# Altium PCB ESP_8266.PcbDoc
Units mil, origin at the board's own origin, x right, y up, seen from the top; angles counter-clockwise.
Board outline 3942.6 x 4020.22 mil, 2 copper layers (Top, Bottom), stack 12.7 mil thick; 90 components, 68 nets, 313 pads, 72 vias.
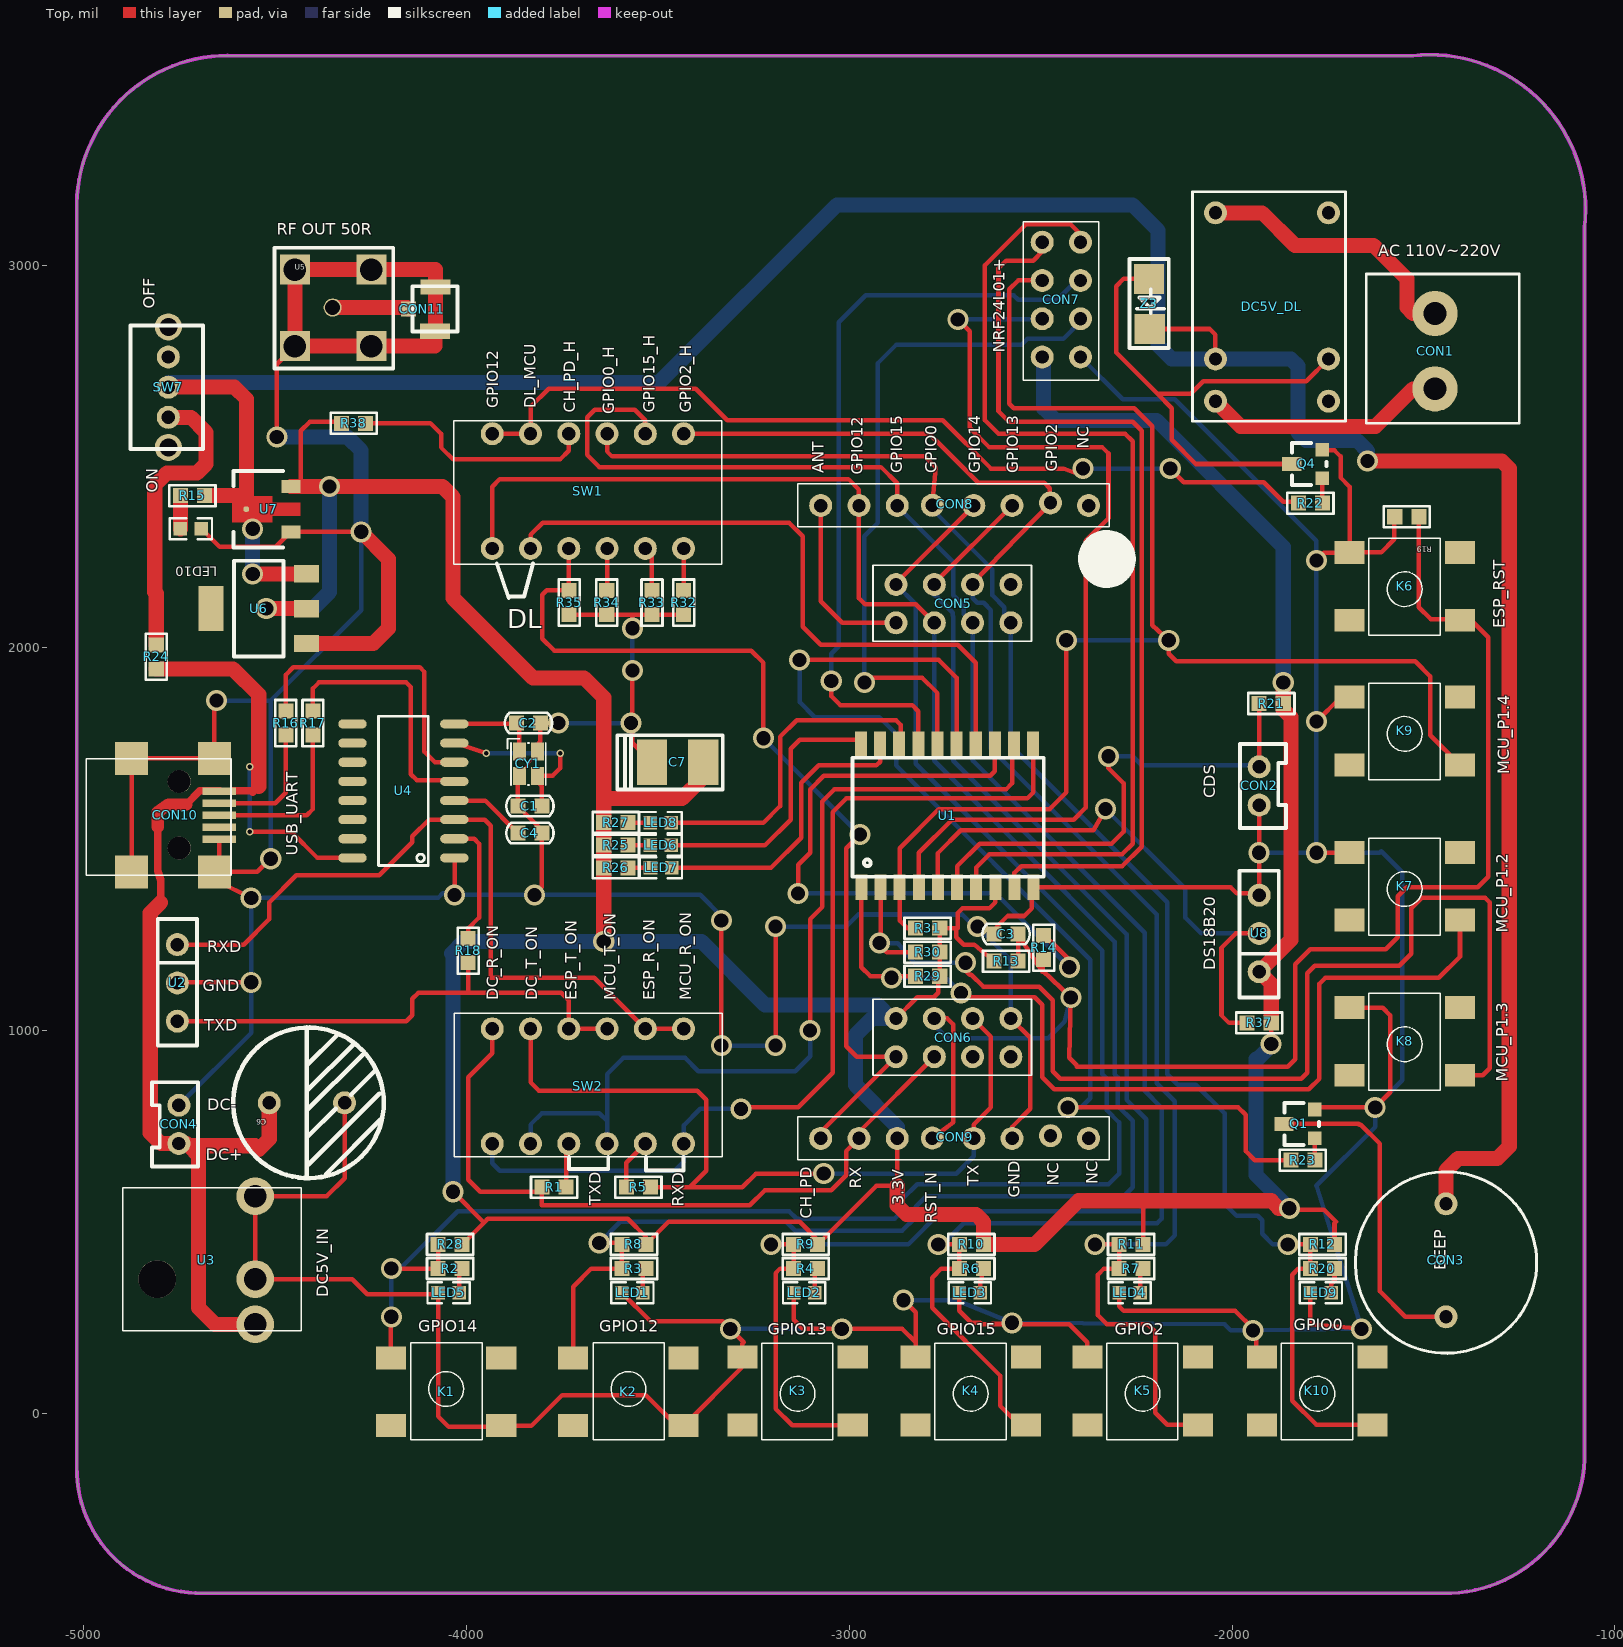
[diagram p0: Top view]
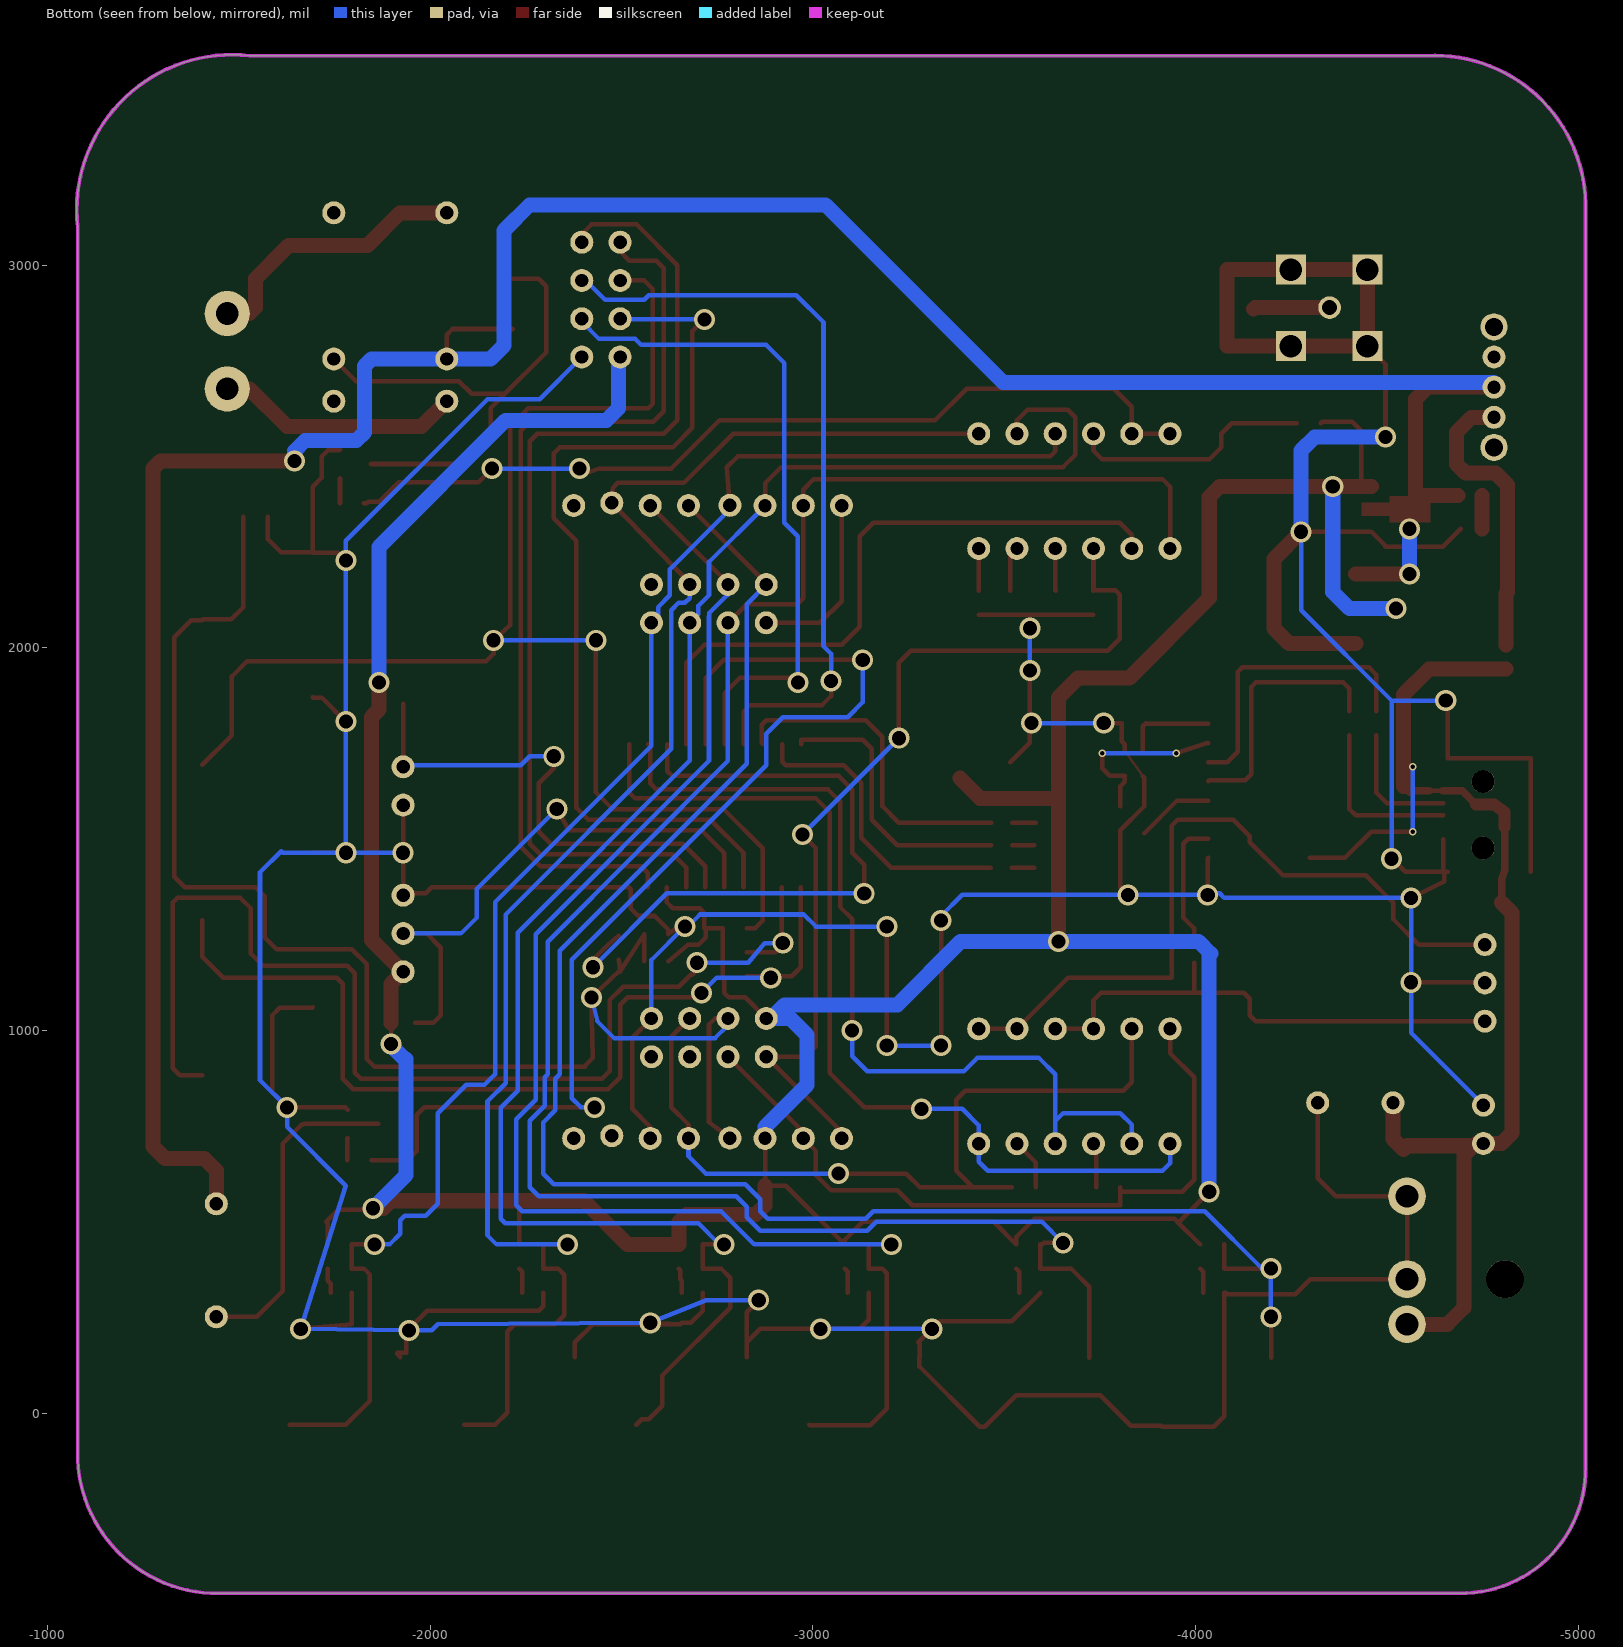
[diagram p1: Bottom view, seen from below]

## Layer stack, top to bottom
Solder Mask Top: solder mask 0.4, Solder Resist, Dk 3.5
Top: signal copper 1.35
Dielectric 1: dielectric 10, FR-4, Dk 4.3
Bottom: signal copper 1.35
Solder Mask Bottom: solder mask 0.4, Solder Resist, Dk 3.5

## Board outline
-5018.7,3139.63 -5018.71,3139.89 cw(c-4624.17,3152.98) -4604.57,3547.24 -1527.56,3547.24 -1527.89,3547.21 cw(c-1482.59,3143.39) -1078.74,3098.43 -1078.74,-122.05 -1078.73,-121.9 cw(c-1443.9,-105.31) -1427.17,-470.47 -4688.98,-470.47 -4689.17,-470.48 cw(c-4694.27,-146.04) -5018.7,-140.75

## Design rules (kind name [scope] priority, off if disabled: settings)
Clearance "Clearance - Default - DEFAULT- SMD" [IsVia vs IsSMTPin] p1: gap=6
Clearance "Clearance - Default - DEFAULT - Via" [IsVia vs IsVia] p2: gap=6
Clearance "Clearance - Default - DEFAULT - Net" [All] p3: gap=6 except(10: Text-Text; 19.68: Arc-Fill Arc-Poly Arc-Region Track-Fill Track-Poly Track-Region SMDPad-Fill SMDPad-Poly SMDPad-Region THPad-Fill THPad-Poly THPad-Region Via-Fill Via-Poly Via-Region Fill-Fill Fill-Poly Fill-Region Poly-Poly Poly-Region Region-Region)
ComponentClearance "ComponentClearance - Default - DEFAULT" [All] p1: gap=6 collisioncheckmode=3 verticalgap=10 showdistances=FALSE
FanoutControl Fanout_Small [(CompPinCount < 5)] p3: bgadir=Out bgaviamode=Centered fanoutstyle=Auto fanoutdirection=OutThenIn viagrid=1 // Fanout_Small (Default Rule)
FanoutControl Fanout_SOIC [IsSOIC] p4: bgadir=Out bgaviamode=Centered fanoutstyle=Auto fanoutdirection=Alternating viagrid=1 // Fanout_SOIC (Default Rule)
HoleToHoleClearance "HoleToHoleClearance - Default - DEFAULT" [All] p1: gap=6 allowstackedmicrovias=TRUE
Length "Default Length" [All] p1: maxlimit=50000 minlimit=0
MaxMinImpedance "Default Impedance" [All] p1: minimum=50.00 maximum=150.0
ParallelSegment "Default Parallel Segment Adjasent" [All] p1: limit=1000 gap=200
ParallelSegment "Default Parallel Segment Same Layer" [All] p2: limit=1000 gap=200
PlaneConnect "Default PlaneConnect" [All] p1: planeconnectstyle=Relief reliefexpansion=20 reliefentries=0 reliefconductorwidth=15 reliefairgap=10
PolygonConnect "PolygonConnect - Default SMT" [IsSMTPin] p1: connectstyle=Direct reliefconductorwidth=10 reliefentries=4 polygonreliefangle="45 Angle" airgapwidth=10
PolygonConnect "PolygonConnect - Default Pad" [All] p2: connectstyle=Direct reliefconductorwidth=15 reliefentries=4 polygonreliefangle="45 Angle" airgapwidth=10
RoutingLayers "RoutingLayers - Default - DEFAULT" [All] p1: top layer_v5=TRUE bottom layer_v5=TRUE
RoutingPriority "RoutingPriority - Default - DEFAULT" [All] p1: routingpriority=3
RoutingTopology "Default Routing Topology" [All] p1: topology=Shortest
RoutingVias "RoutingVias - Default - DEFAULT" [All] p1: holewidth=37 width=55 viastyle="Through Hole" minholewidth=37 minwidth=55 maxholewidth=37 maxwidth=55
SMDToCorner "SMDToCorner - Default - DEFAULT" [All] p1: distance=60000
SolderMaskExpansion [All] p1: expansion=4
Width "Default Width" [All] p1: maxlimit=196.85 minlimit=6 preferedwidth=11.81
22 further rules are at their usual default settings.

## Components (designator, comment, footprint, x,y, rotation, side; value= is the part's Value field where it differs from the comment)
C1 "C0805$2F$0603" C0805$2F$0603 -3834.65,1586.61 r180 top
C2 "C0805$2F$0603" C0805$2F$0603 -3838.58,1803.15 r180 top
C3 "C0805$2F$0603" C0805$2F$0603 -2590.55,1251.97 r180 top
C4 "C0805$2F$0603" C0805$2F$0603 -3834.65,1515.75 r0 top
C6 "EC-10" EC-10 -4515.75,811.02 r0 top
C7 "EC" EC -3330.71,1629.92 r90 top
CON1 "AC2P" AC2P -1649.61,2586.61 r90 top
CON2 "2PIN" 2PIN -1929.13,1688.98 r270 top
CON3 "BEEP" BEEP -1440.94,393.7 r0 top
CON4 "2PIN" 2PIN -4751.97,704.72 r90 top
CON5 "DIP8" DIP8 -2877.95,2165.35 r0 top
CON6 "DIP8" DIP8 -2877.95,1031.5 r0 top
CON7 "DIP8" DIP8 -2496.06,2759.84 r90 top
CON8 "SDIP8" SDIP8 -2374.02,2370.08 r90 top
CON9 "SDIP8" SDIP8 -2374.02,716.54 r90 top
CON10 "MINUSB" MINUSB -5047.24,1535.43 r0 top
CON11 "IPX" IPX -4141.73,2826.77 r0 top
CY1 "CRYS$2F$SMD$2F$2.0X2.5$2F$CXA-04000-2F3F40" CRYS$2F$SMD$2F$2.0X2.5$2F$CXA-04000-2F3F40 -3838.58,1696.85 r270 top
DC5V_DL "JDQ" JDQ -2043.31,2641.73 r90 top
K1 "QCKG" QCKG -4003.94,86.61 r180 top
K2 "QCKG" QCKG -3527.56,86.61 r180 top
K3 "QCKG" QCKG -3185.04,27.56 r0 top
K4 "QCKG" QCKG -2732.28,27.56 r0 top
K5 "QCKG" QCKG -2283.46,27.56 r0 top
K6 "QCKG" QCKG -1598.43,2129.92 r0 top
K7 "QCKG" QCKG -1598.43,1346.46 r0 top
K8 "QCKG" QCKG -1598.43,940.94 r0 top
K9 "QCKG" QCKG -1598.43,1751.97 r0 top
K10 "QCKG" QCKG -1826.77,27.56 r0 top
LED1 "0603" 0603 -3594.49,314.96 r0 top
LED2 "0603" 0603 -3145.67,314.96 r0 top
LED3 "0603" 0603 -2712.6,314.96 r0 top
LED4 "0603" 0603 -2295.28,314.96 r0 top
LED5 "0603" 0603 -4074.8,314.96 r0 top
LED6 "0603" 0603 -3465.35,1484.25 r180 top
LED7 "0603" 0603 -3464.57,1425.2 r180 top
LED8 "0603" 0603 -3465.35,1543.31 r180 top
LED9 "0603" 0603 -1795.28,314.96 r0 top
LED10 "0603" 0603 -4692.91,2311.02 r180 top
Q1 "SOT23" SOT23 -1822.83,755.91 r90 top
Q4 "SOT23" SOT23 -1803.15,2480.31 r90 top
R1 "R0805$2F$0603" R0805$2F$0603 -3771.65,590.55 r0 top
R2 "R0805$2F$0603" R0805$2F$0603 -4043.31,377.95 r0 top
R3 "R0805$2F$0603" R0805$2F$0603 -3562.99,377.95 r0 top
R4 "R0805$2F$0603" R0805$2F$0603 -3114.17,377.95 r0 top
R5 "R0805$2F$0603" R0805$2F$0603 -3551.18,590.55 r180 top
R6 "R0805$2F$0603" R0805$2F$0603 -2681.1,377.95 r0 top
R7 "R0805$2F$0603" R0805$2F$0603 -2263.78,377.95 r0 top
R8 "R0805$2F$0603" R0805$2F$0603 -3562.99,440.94 r0 top
R9 "R0805$2F$0603" R0805$2F$0603 -3114.17,440.94 r0 top
R10 "R0805$2F$0603" R0805$2F$0603 -2681.1,440.94 r0 top
R11 "R0805$2F$0603" R0805$2F$0603 -2263.78,440.94 r0 top
R12 "R0805$2F$0603" R0805$2F$0603 -1763.78,440.94 r0 top
R13 "R0805$2F$0603" R0805$2F$0603 -2590.55,1181.1 r0 top
R14 "R0805$2F$0603" R0805$2F$0603 -2492.13,1216.54 r270 top
R15 "R0805$2F$0603" R0805$2F$0603 -4716.54,2397.64 r180 top
R16 "R0805$2F$0603" R0805$2F$0603 -4472.44,1803.15 r90 top
R17 "R0805$2F$0603" R0805$2F$0603 -4401.57,1803.15 r90 top
R18 "R0805$2F$0603" R0805$2F$0603 -3996.06,1208.66 r270 top
R19 "R0805$2F$0603" R0805$2F$0603 -1543.31,2342.52 r180 top
R20 "R0805$2F$0603" R0805$2F$0603 -1763.78,377.95 r0 top
R21 "R0805$2F$0603" R0805$2F$0603 -1897.64,1854.33 r0 top
R22 "R0805$2F$0603" R0805$2F$0603 -1795.28,2377.95 r180 top
R23 "R0805$2F$0603" R0805$2F$0603 -1814.96,661.42 r180 top
R24 "R0805$2F$0603" R0805$2F$0603 -4811.02,1976.38 r90 top
R25 "R0805$2F$0603" R0805$2F$0603 -3610.24,1484.25 r0 top
R26 "R0805$2F$0603" R0805$2F$0603 -3610.24,1425.2 r0 top
R27 "R0805$2F$0603" R0805$2F$0603 -3610.24,1543.31 r0 top
R28 "R0805$2F$0603" R0805$2F$0603 -4043.31,440.94 r0 top
R29 "R0805$2F$0603" R0805$2F$0603 -2795.28,1141.73 r180 top
R30 "R0805$2F$0603" R0805$2F$0603 -2795.28,1204.72 r180 top
R31 "R0805$2F$0603" R0805$2F$0603 -2795.28,1267.72 r180 top
R32 "R0805$2F$0603" R0805$2F$0603 -3433.07,2118.11 r270 top
R33 "R0805$2F$0603" R0805$2F$0603 -3515.75,2118.11 r270 top
R34 "R0805$2F$0603" R0805$2F$0603 -3633.86,2118.11 r270 top
R35 "R0805$2F$0603" R0805$2F$0603 -3732.28,2118.11 r270 top
R37 "R0805$2F$0603" R0805$2F$0603 -1929.13,1019.69 r0 top
R38 "R0805$2F$0603" R0805$2F$0603 -4295.28,2586.61 r0 top
SW1 "BM_6_DEC" BM_6_DEC -3354.33,2578.74 r180 top
SW2 "BM_6_DEC" BM_6_DEC -4011.81,685.04 r0 top
SW7 "DC_SW" DC_SW -4779.53,2523.62 r90 top
U1 "SOP20" SOP20 -2968.5,1661.42 r0 top
U2 "3PIN" 3PIN -4755.91,1224.41 r270 top
U3 "DC_CON8" DC_CON8 -4543.31,224.41 r90 top
U4 "SO16MB" SO16MB -4165.35,1625.98 r90 top
U5 "SMA" SMA -4448.82,2988.19 r0 top
U6 "SOT223" SOT223 -4543.31,2102.36 r90 top
U7 "SOT89" SOT89 -4539.37,2362.2 r90 top
U8 "3PIN" 3PIN -1929.13,1153.54 r90 top
Z3 "DIDO-1" DIDO-1 -2216.54,2964.57 r270 top

## Footprints (in the part's own frame and the unit in brackets; to place one, negate y for a bottom-side part, rotate by r counter-clockwise, add the part's x,y. Pads: shape width x height; smd on the part's side, far side on the other; paste and mask are expansions set on the pad)
2PIN [mil]
  round 60 hole 35: 1(0,0) 2(100,0)
  silkscreen extent -60,-50 160,70
3PIN [mil]
  round 60 hole 35: 1(0,0) 2(100,0) 3(200,0)
  silkscreen extent -67,-51 264,51
0603 [mm]
  rect 0.9x0.9 smd: 1(0,0) 2(1.397,0)
  silkscreen extent -0.7,-0.7 2.1,0.7
AC2P [mm]
  round 3 hole 1.5: 1(2.286,-4.572) 2(7.286,-4.572)
  silkscreen extent 0,-10.16 9.91,0
BEEP [mil]
  round 60 hole 35: 1(0,153.54) 2(0,-141.73)
  silkscreen extent -237,-237 237,237
BM_6_DEC [mil]
  round 60 hole 35: 1(78.74,319.29) 2(178.74,319.29) 3(278.74,319.29) 4(378.74,319.29) 5(478.74,319.29) 6(578.74,319.29) 7(578.74,19.29) 8(478.74,19.29) 9(378.74,19.29) 10(278.74,19.29) 11(178.74,19.29) 12(78.74,19.29)
  silkscreen extent -21,-15 679,361
C0805$2F$0603 [mm]
  rrect0% 1x1 smd: 1(-0.8,0) 2(0.8,0)
  silkscreen extent -1.57,-0.68 1.57,0.68
CRYS$2F$SMD$2F$2.0X2.5$2F$CXA-04000-2F3F40 [mm]
  rect 1.2x0.85 smd: 1(-0.813,-0.6) 2(0.813,-0.6) 3(0.813,0.6) 4(-0.813,0.6)
  silkscreen extent -1.66,-1.4 1.41,1.15
DC_CON8 [mm]
  round 2.5 hole 1.5: 1(3.2,0.23) 2(0.2,0.23) 3(8.7,0.23)
  round 2.5 hole 2.5: 4(3.2,6.73)
  silkscreen extent -0.23,-2.83 9.28,9.02
DC_SW [mm]
  round 1.8 hole 1.2: 1(0,0) 5(8,0)
  round 1.524 hole 0.889: 2(2,0) 3(4,0) 4(6,0)
  silkscreen extent -0.1,-2.3 8.1,2.5
DIDO-1 [mm]
  rrect0% 2x2 smd: 1(0.01,0) 2(3.34,0.04)
  silkscreen extent -1.3,-1.3 4.6,1.3
DIP8 [mil]
  round 60 hole 35: 1(300,0) 2(200,0) 3(100,0) 4(0,0) 5(0,-100) 6(100,-100) 7(200,-100) 8(300,-100)
  silkscreen extent -60,-148 354,50
EC [mm]
  rect 3x2 smd: 1(1.8,4.7) 2(1.8,1.3)
  silkscreen extent 0,0 3.6,7
EC-10 [mil]
  round 60 hole 35: 1(0,0) 2(196.85,0)
  silkscreen extent -94,-197 299,197
IPX [mm]
  rect 2x1 smd: 1(1.53,2.96) 2(1.51,0.01)
  rrect0% 1x1 smd: 3(-0.25,1.48)
  silkscreen extent 0,0 3,3
JDQ [mil]
  round 60 hole 35: 1(2.8,0) 2(494.93,0) 3(2.8,-295.28) 4(494.93,-295.28) 5(113.04,0) 6(113.04,-295.28)
  silkscreen extent -50,-340 550,60
MINUSB [mm]
  rect 2.2x0.5 smd: 1(10.18,-0.92) 2(10.18,-0.12) 3(10.18,0.68) 4(10.18,1.48) 5(10.18,2.28)
  rect 2.2x2.2 smd: 6(9.86,4.46) 7(9.86,-3.07) 8(4.36,4.46) 9(4.36,-3.07)
  round 1.524 hole 1.524: 10(7.52,2.92) 11(7.52,-1.49)
  silkscreen extent 1.35,-3.29 10.96,4.44
QCKG [mm]
  rect 2x1.524 smd: 1(-2.4,3.03) 2(4.93,-1.47) 3(4.93,3.03) 4(-2.4,-1.47)
  silkscreen extent -1.12,-2.47 3.61,3.96
R0805$2F$0603 [mm]
  rrect0% 1x1 smd: 1(-0.8,0) 2(0.8,0)
  silkscreen extent -1.53,-0.69 1.54,0.7
SDIP8 [mil]
  round 60 hole 35: 1(1.57,0.79) 2(8.66,100.39) 3(1.57,200.79) 4(1.57,300.79) 5(2.36,409.06) 6(1.57,500.79) 7(1.57,600.79) 8(1.57,700.79)
  silkscreen extent -54,-53 58,761
SMA [mm]
  rect 2x2 hole 1.5: 1(0,0) 2(5.08,0) 3(0,-5.08) 4(5.08,-5.08)
  round 1.2 / inner round 1.5 / far side round 1.5 hole 1: 5(2.51,-2.52)
  silkscreen extent -1.35,-6.56 6.53,1.45
SO16MB [mil]
  oval 24x74 smd: 1(-175,-133) 2(-125,-133) 3(-75,-133) 4(-25,-133) 5(25,-133) 6(75,-133) 7(125,-133) 8(175,-133) 9(175,133) 10(125,133) 11(75,133) 12(25,133) 13(-25,133) 14(-75,133) 15(-125,133) 16(-175,133)
  silkscreen extent -195,-65 195,65
SOP20 [mm]
  rect 0.8x1.7 smd: 1(0,-7.3) 2(1.27,-7.3) 3(2.54,-7.3) 4(3.81,-7.3) 5(5.08,-7.3) 6(6.35,-7.3) 7(7.62,-7.3) 8(8.89,-7.3) 9(10.16,-7.3) 10(11.43,-7.3) 11(11.4,2.2) 12(10.13,2.2) 13(8.86,2.2) 14(7.59,2.2) 15(6.32,2.2) 16(5.05,2.2) 17(3.78,2.2) 18(2.51,2.2) 19(1.24,2.2) 20(-0.03,2.2)
  silkscreen extent -0.6,-6.6 12.1,1.3
SOT23 [mil]
  rect 36x36 smd: 1(-37.5,-39) 2(37.5,-39)
  rect 36x50 smd: 3(0,41)
  silkscreen extent -55,-50 55,40
SOT89 [mil]
  rect 34x50 smd: 1(-59,-80) 3(59,-80)
  round 15 smd: 2(0,36.5)
  Top region: -17,-105 -17,-32 -33.5,-32 -33.5,73 33.5,73 33.5,-32 17,-32 17,-105 -17,-105
  silkscreen extent -100,-60 100,70
SOT223 [mil]
  rect 45x65 smd: 1(-91,-125) 2(0,-125) 3(91,-125)
  rect 118x65 smd: 4(0,125)
  silkscreen extent -125,-65 125,65

## Via types
v1: diameter 55, hole 37, Top to Bottom, 68 vias
v2: diameter 19.68, hole 11.81, Top to Bottom, 4 vias

## Nets (pads, with @x,y where several pads share a name; then routed paths per layer and width w, separated by ;. In a path a pad name is that pad's centre, name@x,y a point inside that pad or via, vN(x,y) a via of type N, cw(c..) or ccw(c..) an arc to the next point about the centre after c; other vN are vias at no path point)
3.3VD: C7.2 CON6.4 CON7.4 CON9.6 R8.2 R9.2 R10.2 R11.2 R12.2 R13.1 R21.2 R25.1 R26.1 R27.1 R28.2 R29.1 R30.1 R31.1 R37.2 R38.1 U1.8 U6.2 U7.3 U8.1 | length 11790
  Top w11.81: -4433.07,2421.2 -4433.07,2566.93 -4409.45,2590.55 -4330.71,2590.55 R38.1 ; v1(-4035.43,578.74) -3954.72,498.03 ; R28.2 -3954.72,498.03 ; v1(-3641.73,1232.28) v1@-3641.73,1235.94 ; R25.1@-3641.73,1476.38 R25.1 ; CON6.4 -2822.83,1086.61 -2779.53,1086.61 -2767.72,1098.43 -2767.72,1137.8 R29.1 R31.1 -2720.47,1267.72 ; CON9.6 -2874.8,594.49 -2929.13,594.49 R9.2 -3082.68,452.76 -3129.92,500 -3472.44,500 R8.2 -3531.5,460.63 -3578.74,507.87 -3944.88,507.87 -3954.72,498.03 ; R13.1 -2673.23,1224.41 -2700.79,1224.41 -2720.47,1244.09 -2720.47,1267.72 ; U1.8 -2618.5,1334.65 -2633.86,1319.29 -2704.33,1319.29 -2716.54,1307.09 -2716.54,1267.72 -2720.47,1267.72 ; R11.2 -2232.28,555.12 ; v1(-1897.64,964.57) R37.2 ; v1@-1862.2,535.43 v1(-1850.39,535.43) -1850.39,531.5 -1759.84,531.5 -1728.35,500 -1732.28,496.06 R12.2
  Top w39.37: v1(-4523.62,2102.36) U6.2 ; U7.3 -4433.07,2421.2 v1@-4358.27,2421.2 ; v1(-4358.27,2421.26) v1@-4358.27,2421.2 ; v1@-3641.73,1235.94 R25.1@-3641.73,1476.38 ; R25.1 -3641.73,1606.3 ; C7.2@-3383.86,1659.41 -3436.97,1606.3 -3641.73,1606.3 ; -2874.8,594.49 -2874.8,543.31 -2851.18,519.69 -2669.29,519.69 -2649.61,500 R10.2 -2515.75,440.94 -2401.57,555.12 -2232.28,555.12 -1897.64,555.12 -1877.95,535.43 v1@-1862.2,535.43 ; R37.2 -1897.64,1122.05 U8.1 -1846.46,1236.22 -1846.46,1818.9 -1866.14,1838.58 v1(-1866.14,1909.45) ; v1@-4358.27,2421.2 -4062.99,2421.2 -4035.49,2393.7 -4035.49,2129.92 -3826.83,1921.26 -3692.91,1921.26 -3641.73,1870.08 -3641.73,1606.3
  Bottom w11.81: v1(-4523.62,2102.36) v1@-4519.69,2102.36 ; CON6.4@-2879.92,1033.46 CON6.4 ; CON9.6 CON9.6@-2874.8,748.03 ; CON7.4 -2496.06,2751.97 CON7.4@-2492.13,2748.03 ; v1@-1897.64,960.63 v1(-1897.64,964.57)
  Bottom w39.37: v1@-4519.69,2102.36 -4401.57,2102.36 -4358.27,2145.67 v1(-4358.27,2421.26) ; v1(-4035.43,578.74) -4035.43,1196.85 -4039.37,1200.79 -4007.87,1232.28 v1(-3641.73,1232.28) -3385.83,1232.28 -3220.47,1066.93 -2925.2,1066.93 -2891.73,1033.46 CON6.4@-2879.92,1033.46 ; CON6.4 -2940.94,1031.5 -2984.25,988.19 -2984.25,857.48 CON9.6@-2874.8,748.03 ; CON7.4@-2492.13,2748.03 -2492.13,2625.98 -2460.63,2594.49 -2196.85,2594.49 -1866.14,2263.78 v1(-1866.14,1909.45) ; v1@-1897.64,960.63 -1933.07,925.2 -1937.01,925.2 -1937.01,622.05 v1(-1850.39,535.43)
$$$3659: LED10.2 R15.2 | length 86.7
  Top w39.37: R15.2 -4748.03,2311.14 LED10.2
$$$7085: CON10.4 R16.1 | length 335.8
  Top w11.81: CON10.4 -4500,1593.7 -4472.44,1621.26 R16.1
$$$7086: CON10.3 R17.1 | length 444.6
  Top w11.81: CON10.3 -4418.11,1562.2 -4401.57,1578.74 R17.1
$$$7894: C4.1 U4.4 | length 201.5
  Top w11.81: U4.4 -3951.38,1600.98 C4.1
$$$9226: R18.1 U4.2 | length 330
  Top w11.81: U4.2 -3980.31,1500.98 -3967.52,1488.19 -3967.52,1295.28 -3996.06,1266.73 R18.1
$$$11331: CON11.3 U5.5 | length 200.1
  Top w39.37: U5.5 -4155.51,2888.98 CON11.3
$$$16237: LED5.2 R2.2 | length 66.3
  Top w11.81: LED5.2 -4019.8,369.96 R2.2
$$$16239: LED1.2 R3.2 | length 66.3
  Top w11.81: LED1.2 -3539.49,369.96 R3.2
$$$16241: LED2.2 R4.2 | length 66.3
  Top w11.81: LED2.2 -3090.67,369.96 R4.2
$$$16242: LED3.2 R6.2 | length 66.3
  Top w11.81: LED3.2 -2657.6,346.46 -2653.54,350.51 -2653.54,374.02 R6.2
$$$16244: LED4.2 R7.2 | length 66.3
  Top w11.81: LED4.2 -2240.28,369.96 R7.2
$$$17273: R14.1 U1.13 | length 1758
  Top w11.81: v1(-3133.86,1358.27) -3133.86,1433.07 -3102.36,1464.57 -3102.36,1629.92 -3066.93,1665.35 -2631.5,1665.35 -2619.69,1677.17 U1.13 ; R14.1 -2464.57,1224.41 -2425.2,1185.04 v1(-2425.2,1165.35)
  Bottom w11.81: v1(-3133.86,1358.27) -2618.11,1358.27 v1(-2425.2,1165.35)
$$$19863: CON1.1 DC5V_DL.1 | length 641.5
  Top w11.81: CON1.1@-1527.56,2676.61 CON1.1
  Top w39.37: DC5V_DL.1 -1977.51,2578.74 -1625.43,2578.74 CON1.1@-1527.56,2676.61
$$$19865: CON1.2 DC5V_DL.2 | length 726.5
  Top w39.37: DC5V_DL.2 -1921.26,3136.66 -1835.78,3051.18 -1629.92,3051.18 -1543.31,2964.57 -1543.31,2889.76 -1527.01,2873.46 CON1.2
$$$20007: Q4.1 R22.1 | length 65
  Top w11.81: Q4.1 -1764.15,2378.32 R22.1
$$$20100: R24.2 SW7.2 | length 773.1
  Top w39.37: R24.2 -4811.02,2141.73 -4814.96,2145.67 -4814.96,2425.2 -4783.46,2456.69 -4704.72,2456.69 -4681.1,2480.31 -4681.1,2562.99 -4720.47,2602.36 SW7.2
$$$20224: CON3.2 Q1.3 | length 879.7
  Top w11.81: Q1.3 -1669.29,755.91 -1667.32,753.94 -1663.39,753.94 -1614.17,704.72 -1614.17,319.17 -1546.97,251.97 -1456.69,251.97 -1448.82,259.84 -1440.94,267.72 CON3.2
$$$20225: Q1.1 R23.1 | length 57.1
  Top w11.81: Q1.1 -1783.46,718.04 R23.1
$$$20451: LED6.2 R25.2 | length 58.4
  Top w11.81: R25.2 LED6.2
$$$20462: LED7.2 R26.2 | length 59.2
  Top w11.81: R26.2 LED7.2
$$$20469: LED8.2 R27.2 | length 62.3
  Top w11.81: R27.2@-3582.68,1543.31 R27.2 LED8.2
$$$20486: DC5V_DL.6 Q4.3 Z3.1 | length 1379.8
  Top w11.81: Z3.1 -2283.46,2964.17 -2302.76,2944.88 -2302.76,2771.65 -2194.69,2663.58 ; Q4.3 -2094.49,2480.31 -2157.48,2543.31 -2157.48,2626.38 -2194.69,2663.58 ; DC5V_DL.6 -1805.95,2696.85 -2074.8,2696.85 -2108.07,2663.58 -2194.69,2663.58
$$$29715: LED9.2 R20.2 | length 66.3
  Top w11.81: LED9.2 -1740.28,338.58 -1732.28,346.57 R20.2
$$$30294: R32.1 SW1.1 | length 109.8
  Top w11.81: R32.1 SW1.1
$$$30295: R33.1 SW1.2 | length 117
  Top w11.81: SW1.2 -3515.75,2242.13 R33.1
$$$30296: R34.1 SW1.3 | length 110.2
  Top w11.81: R34.1 -3633.07,2150.39 SW1.3
$$$30660: R38.2 SW1.9 | length 644.5
  Top w11.81: R38.2 -4094.49,2586.61 -4066.93,2559.06 -4066.93,2523.62 -4035.43,2492.13 -3755.91,2492.13 -3733.07,2514.96 SW1.9
+5V: C6.1 CON4.1 CON10.5 R24.1 U3.2 U4.16 | length 3205.8
  Top w11.81: -4807.09,1527.56 -4807.09,1531.5 ; CON10.5 -4645.67,1625.98 -4637.8,1625.98 CON10.5@-4610.24,1625.98 ; v2(-4566.93,1519.69) -4458.46,1519.69 -4389.76,1450.98 U4.16 ; v2(-4566.93,1688.98) -4543.31,1688.98
  Top w19.68: -4807.09,1527.56 -4807.09,1417.32 -4799.41,1393.5 -4799.41,1334.45 ; -4732.28,1590.55 -4696.85,1625.98 CON10.5@-4645.67,1625.98 ; CON10.5@-4610.24,1625.98 -4562.99,1625.98 -4559.06,1622.05 -4543.31,1637.8
  Top w31.5: -4807.09,1531.5 -4807.09,1570.87 -4779.53,1590.55 -4732.28,1590.55
  Top w39.37: R24.1 -4610.24,1944.88 -4543.31,1877.95 -4543.31,1688.98 -4543.31,1637.8 ; -4799.41,1334.45 -4826.77,1307.09 -4826.77,732.28 -4799.21,704.72 CON4.1 -4732.28,704.72 CON4.1@-4726.38,698.82 ; U3.2 -4657.48,232.28 -4700.79,275.59 -4700.79,673.23 CON4.1@-4726.38,698.82 ; C6.1 -4515.75,716.54 -4543.31,688.98 -4553.15,698.82 CON4.1@-4726.38,698.82
  Bottom w11.81: v2(-4566.93,1519.69) v2(-4566.93,1688.98)
BP: R23.2 U1.15 | length 2926.6
  Top w11.81: v1(-3129.92,1968.5) -2766.93,1968.5 -2719.69,1921.26 U1.15 ; v1(-2429.13,799.21) -1984.25,799.21 -1964.57,779.53 -1964.57,685.04 -1940.94,661.42 R23.2
  Bottom w11.81: v1(-3129.92,1968.5) -3129.92,1858.27 -3090.55,1818.9 -2921.26,1818.9 -2877.95,1775.59 -2877.95,1692.91 -2370.08,1185.04 -2370.08,822.83 -2393.7,799.21 v1(-2429.13,799.21)
CDS: CON2.1 R21.1 U1.6 | length 1311.3
  Top w11.81: U1.6 -2718.5,1429.13 -2659.45,1488.19 -2314.96,1488.19 -2283.46,1519.69 -2283.46,1645.67 -2322.83,1685.04 v1(-2322.83,1716.54) ; CON2.1 R21.1
  Bottom w11.81: v1(-2322.83,1716.54) -2259.84,1716.54 -2236.22,1692.91 -1933.07,1692.91 CON2.1
CH_PD: CON6.5 CON9.8 R35.1 SW1.4 | length 2459.8
  Top w11.81: SW1.4 R35.1@-3733.07,2150.39 ; R35.1 R35.1@-3733.07,2150.39 ; v1(-3224.41,1763.78) -3224.41,1960.63 -3255.91,1992.13 -3770.53,1992.13 -3802.03,2023.62 -3802.03,2138.91 -3790.55,2150.39 R35.1@-3733.07,2150.39 ; CON9.8 -3074.8,734.65 CON6.5 -2980.31,931.5 -3007.87,959.06 -3007.87,1476.38 v1(-2972.44,1511.81)
  Bottom w11.81: v1(-3224.41,1763.78) v1(-2972.44,1511.81)
D+: R17.2 U4.5 | length 675.6
  Top w11.81: R17.2 -4401.57,1893.7 -4385.83,1909.45 -4157.48,1909.45 -4145.67,1897.64 -4145.67,1669.29 -4129.92,1653.54 -4034.91,1653.54 U4.5
D-: R16.2 U4.6 | length 767.8
  Top w11.81: R16.2 -4472.44,1929.13 -4452.76,1948.82 -4122.05,1948.82 -4110.24,1937.01 -4110.24,1728.35 -4082.68,1700.79 -4032.55,1700.79 U4.6
DL_C: R22.2 SW1.7 SW1.8 | length 2343.6
  Top w11.81: SW1.7 SW1.8 -3833.07,2629.92 -3785.83,2677.17 -3401.57,2677.17 -3318.9,2594.49 -2755.91,2594.49 -2629.92,2468.5 -2440.94,2468.5 -2396.36,2451.36 -2389.76,2448.82 v1(-2389.76,2468.5) ; v1(-2161.42,2468.5) -2125.98,2433.07 -1917.32,2433.07 -1866.14,2381.89 -1838.58,2381.89 -1834.65,2377.95 R22.2
  Bottom w11.81: v1(-2389.76,2468.5) v1(-2161.42,2468.5)
DL_MCU: SW1.5 U1.14 | length 1715.4
  Top w11.81: SW1.5 -3833.07,2295.28 -3801.57,2326.77 -3157.48,2326.77 -3122.05,2291.34 -3122.05,2055.12 -3074.8,2007.87 -2716.54,2007.87 -2669.29,1960.63 -2669.29,1748.43 U1.14
GND: C1.2 C2.1 C3.2 C4.2 C6.2 C7.1 CON2.2 CON4.2 CON6.1 CON7.5 CON9.3 CON10.1 CON10.6 CON10.7 CON10.8 CON10.9 CON11.1 CON11.2 CY1.2 CY1.4 K1.1 K2.1 K3.1 K4.1 K5.1 K6.1 K7.1 K8.1 K9.1 K10.1 LED1.1 LED2.1 LED3.1 LED4.1 LED5.1 LED9.1 LED10.1 Q1.2 Q4.2 R19.2 R32.2 R33.2 R34.2 R35.2 U1.10 U2.2 U3.1 U3.3 U4.1 U5.1 U5.2 U5.3 U5.4 U6.1 U7.1 U8.3 | length 22511.5
  Top w5.91: CY1.2 -3818.9,1724.41 CY1.4
  Top w11.81: CON10.9 CON10.8 CON10.6 -4659.06,1856.69 v1(-4653.54,1862.2) ; U2.2 -4754.33,1125.98 v1(-4562.99,1125.98) ; LED10.1 -4645.67,2263.78 -4496.06,2263.78 -4496.06,2266.51 U7.1 -4275.65,2303.2 v1(-4275.59,2303.15) ; CON10.7 CON10.7@-4649.61,1414.57 ; CON10.1 -4646.46,1416.54 CON10.7@-4648.43,1414.57 ; v1(-4562.99,1346.46) -4649.61,1389.76 CON10.7@-4649.61,1413.39 ; v1(-4511.81,1448.82) -4512.99,1448.82 -4547.24,1414.57 CON10.7@-4648.43,1414.57 ; v1(-4496.06,2551.18) -4496.06,2740.94 U5.3 ; C6.2 -4318.9,614.17 -4366.14,566.93 U3.3 U3.1 -4299.21,350.39 -4259.84,311.02 -4082.68,311.02 -4078.74,314.96 LED5.1 -4074.8,-7.87 -4047.24,-35.43 -3912.2,-35.43 K1.1 -3830.71,-32.68 -3750.79,47.24 -3531.5,47.24 -3448.82,-35.43 -3435.83,-35.43 K2.1 -3278.35,122.05 -3278.35,145.67 K3.1 -3279.53,181.1 -3275.59,185.04 v1(-3311.02,220.47) -3330.71,240.16 -3519.69,240.16 LED1.1 ; U4.1 -4031.5,1450.13 v1(-4031.5,1354.33) ; CY1.2 -3866.14,1660.93 C1.2 -3803.15,1523.62 C4.2 -3803.15,1374.02 v1(-3822.83,1354.33) ; CY1.4 -3814.96,1748.03 -3807.09,1755.91 C2.1 v1(-3759.84,1803.15) ; R35.2 R34.2 -3566.93,2086.61 ; v1@-3582.68,1814.96 v1@-3576.94,1805.17 ; v1@-3574.5,1801.02 v1@-3576.94,1805.17 ; v1(-3570.87,1803.15) v1@-3576.94,1805.17 ; v1(-3566.93,1940.94) -3566.93,1751.97 C7.1 ; v1(-3566.93,2051.18) -3566.93,2086.61 ; R32.2 R33.2 -3566.93,2086.61 ; v1(-3334.65,960.63) v1(-3334.65,1287.4) ; v1(-3192.91,960.63) v1(-3192.91,1271.65) ; LED2.1 -3145.67,244.09 -3122.05,220.47 v1(-3019.69,220.47) -2862.2,220.47 -2826.77,185.04 ; v1(-2858.27,295.28) -2826.77,263.78 -2826.77,185.04 ; K4.1 -2826.77,185.04 ; LED3.1 -2712.6,267.72 -2681.1,236.22 -2657.48,236.22 -2653.54,232.28 ; v1(-2665.35,1271.65) -2649.61,1271.65 C3.2 -2622.05,1263.78 -2586.61,1299.21 -2543.31,1299.21 -2523.62,1318.9 -2523.62,1368.9 U1.10 -2003.94,1374.02 -1988.19,1358.27 U8.3@-1929.13,1358.27 ; CON6.1 -2527.56,981.1 -2527.56,795.28 -2574.8,748.03 CON9.3 ; v1(-2574.8,236.22) -2653.54,232.28 ; K5.1 -2377.95,185.04 -2425.2,232.28 -2653.54,232.28 ; LED4.1 -2295.28,279.53 -2283.46,267.72 -1992.13,267.72 v1@-1944.88,220.47 ; v1(-1944.88,216.54) v1@-1944.88,220.47 ; U8.3 U8.3@-1929.13,1358.27 ; CON2.2 v1(-1929.13,1464.57) U8.3@-1929.13,1358.27 ; K10.1 -1913.39,154.72 -1913.39,157.48 -1937.01,157.48 -1937.01,212.6 v1@-1944.88,220.47 ; LED9.1 -1795.28,232.28 v1(-1661.42,220.47) ; Q1.2 -1778.03,799.21 v1(-1625.98,799.21) -1586.61,838.58 -1586.61,1039.37 -1606.3,1059.06 -1691.73,1059.06 K8.1 ; v1(-1779.53,1464.57) -1694.09,1464.57 K7.1 ; v1(-1779.53,1807.09) -1716.54,1870.08 -1694.09,1870.08 K9.1 ; v1(-1779.53,2228.35) -1759.84,2248.03 -1694.09,2248.03 K6.1 ; Q4.2 -1762.08,2515.75 -1732.28,2515.75 -1716.54,2500 -1716.54,2444.88 -1692.91,2421.26 K6.1 ; R19.2 -1575.98,2341.34 -1575.98,2283.46 -1610.24,2249.21 K6.1 ; CON10.7@-4649.61,1413.39 CON10.7@-4649.61,1414.57 ; CON10.7@-4649.61,1413.39 CON10.7@-4648.43,1414.57 ; CON10.7@-4649.61,1414.57 CON10.7@-4648.43,1414.57
  Top w39.37: U6.1 -4244.09,2011.36 -4204.72,2050.73 -4204.72,2232.28 v1(-4275.59,2303.15) ; U5.3 U5.1 U5.2 -4081.5,2988.19 CON11.1 -4081.5,2827.95 CON11.2 -4082.28,2788.19 U5.4 U5.3
  Bottom w11.81: CON4.2 -4562.99,993.7 v1(-4562.99,1125.98) v1(-4562.99,1346.46) -4074.8,1346.46 -4062.99,1358.27 -4035.43,1358.27 -4035.43,1350.39 -4031.5,1350.39 v1@-4027.56,1354.33 ; v1(-4653.54,1862.2) -4511.81,1862.2 ; v1(-4511.81,1448.82) -4511.81,1862.2 ; v1(-4275.59,2303.15) -4275.59,2098.43 -4511.81,1862.2 ; v1(-4031.5,1354.33) v1@-4027.56,1354.33 ; v1(-3759.84,1803.15) v1(-3570.87,1803.15) ; v1(-3566.93,1940.94) v1(-3566.93,2051.18) ; v1(-3334.65,960.63) v1(-3192.91,960.63) ; v1(-3334.65,1287.4) -3334.65,1299.21 -3389.76,1354.33 v1(-3822.83,1354.33) v1@-4027.56,1354.33 ; v1(-3311.02,220.47) v1(-3019.69,220.47) ; v1(-3192.91,1271.65) -3007.87,1271.65 -2976.38,1303.15 -2704.72,1303.15 -2673.23,1271.65 v1(-2665.35,1271.65) -2577.95,1184.25 CON6.1 ; v1(-2858.27,295.28) -2720.47,295.28 v1(-2574.8,236.22) -2019.69,232.28 -2003.94,216.54 v1(-1944.88,216.54) v1(-1661.42,220.47) -1779.53,594.49 -1625.98,748.03 v1(-1625.98,799.21) -1555.12,870.08 -1555.12,1413.39 -1610.24,1468.5 -1614.17,1464.57 v1(-1779.53,1464.57) ; CON7.5 -2285.83,2649.61 -2149.61,2649.61 -1779.53,2279.53 v1(-1779.53,2228.35) v1(-1779.53,1807.09) v1(-1779.53,1464.57) ; v1(-1929.13,1464.57) v1(-1779.53,1464.57)
  Bottom w39.37: v1(-4496.06,2551.18) -4311.02,2551.18 -4275.59,2515.75 v1(-4275.59,2303.15)
GPIO0: CON5.8 CON8.5 K10.2 R12.1 R20.1 SW1.10 | length 4160.1
  Top w11.81: SW1.10 -3633.07,2513.07 -3620,2500 -2803.15,2500 -2774.8,2471.65 CON8.5 ; v1(-1854.33,440.94) R12.1 R20.1 -1826.77,377.95 -1842.52,362.2 -1842.52,32.78 -1779.43,-30.31 K10.2
  Bottom w11.81: CON8.5 -2774.8,2353.54 -2625.98,2204.72 -2625.98,2137.01 -2595.28,2106.3 -2595.28,2082.68 CON5.8 -2577.95,1744.09 -2169.29,1335.43 -2169.29,885.83 -2141.73,858.27 -2094.49,858.27 -2019.69,783.46 -2019.69,547.24 -1988.19,515.75 -1933.07,515.75 -1921.26,503.94 -1921.26,468.5 -1893.7,440.94 v1(-1854.33,440.94)
GPIO2: CON5.2 CON8.2 K5.2 R7.1 R11.1 SW1.12 | length 4312.6
  Top w11.81: SW1.12 -2791.34,2559.45 -2662.99,2431.1 -2490.16,2431.1 -2476.38,2417.32 CON8.2@-2476.38,2376.71 ; CON5.2 -2677.95,2168.5 CON8.2@-2476.38,2376.71 ; v1(-2358.27,440.94) R11.1 R7.1 -2334.65,377.95 -2350.39,362.2 -2350.39,255.91 -2326.77,232.28 -2220.47,232.28 -2200.79,212.6 -2200.79,1.18 -2169.29,-30.31 K5.2 ; CON8.2@-2476.38,2376.71 CON8.2 -2476.38,2370.08 CON8.2@-2476.38,2376.71
  Bottom w11.81: CON5.2 -2677.95,2129.92 -2665.35,2117.32 -2648.82,2117.32 -2629.92,2098.43 -2629.92,1736.22 -2196.85,1303.15 -2196.85,862.2 -2149.61,814.96 -2149.61,464.57 -2173.23,440.94 v1(-2358.27,440.94)
GPIO12: CON5.6 CON8.7 K2.2 R3.1 R8.1 SW1.6 | length 5284.2
  Top w11.81: SW1.6 -3933.07,2421.26 -3913.39,2440.94 -3002.36,2440.94 -2974.8,2413.39 CON8.7 -2974.8,2129.92 -2959.06,2114.17 -2826.77,2114.17 CON5.6 ; K2.2 -3721.65,330.71 -3674.41,377.95 R3.1 R8.1@-3594.49,435.79 ; v1(-3653.54,444.88) -3603.58,444.88 -3597.07,438.37 R8.1@-3594.49,435.79 ; R8.1 R8.1@-3594.49,435.79
  Bottom w11.81: v1(-3653.54,444.88) -3598.43,500 -3165.35,500 -3141.73,476.38 -2862.2,476.38 -2826.77,511.81 -2826.77,539.37 -2799.21,566.93 -2283.46,566.93 -2259.84,590.55 -2259.84,763.78 -2299.21,803.15 -2299.21,877.95 -2307.09,885.83 -2307.09,1232.28 -2777.95,1704.72 CON5.6
GPIO13: CON5.3 CON8.3 K3.2 R4.1 R9.1 | length 3914.8
  Top w11.81: v1(-3204.72,440.94) R9.1 R4.1 -3181.1,377.95 -3192.91,366.14 -3192.91,11.81 -3149.61,-31.5 -2992.13,-31.5 K3.2 ; CON5.3 -2777.95,2168.5 CON8.3
  Bottom w11.81: v1(-3204.72,440.94) -2846.46,440.94 -2759.84,527.56 -2240.16,527.56 -2224.41,543.31 -2224.41,767.72 -2275.59,818.9 -2275.59,1251.97 -2728.35,1704.72 -2728.35,2082.68 -2729.53,2083.86 -2729.53,2091.73 -2775.59,2137.8 -2777.95,2137.8 CON5.3
GPIO14: CON5.4 CON8.4 K1.2 R2.1 R28.1 | length 4529.2
  Top w11.81: K1.2 -4198.03,250.79 v1(-4196.85,251.97) ; v1(-4196.85,377.95) R2.1 R28.1 ; CON5.4 -2877.95,2168.5 CON8.4
  Bottom w11.81: v1(-4196.85,251.97) v1(-4196.85,377.95) -4173.23,377.95 -4023.62,527.56 -3157.48,527.56 -3137.8,507.87 -2881.89,507.87 -2862.2,527.56 -2862.2,559.06 -2822.83,598.43 -2322.83,598.43 -2295.28,625.98 -2295.28,759.84 -2326.77,791.34 -2326.77,874.02 -2338.58,885.83 -2338.58,1208.66 -2826.77,1696.85 -2826.77,2114.17 CON5.4
GPIO15: CON5.7 CON8.6 K4.2 R6.1 R10.1 SW1.11 | length 4660.8
  Top w11.81: SW1.11 -3533.07,2594.49 -3560.63,2622.05 -3665.35,2622.05 -3685.04,2602.36 -3685.04,2503.94 -3653.54,2472.44 -2917.32,2472.44 -2874.8,2429.92 CON8.6 ; v1(-2767.72,440.94) R10.1 R6.1 -2759.84,377.95 -2783.46,354.33 -2783.46,275.59 -2606.3,98.43 -2606.3,19.69 -2570.87,-15.75 -2552.76,-15.75 K4.2
  Bottom w11.81: CON8.6 -2870.08,2366.93 -2870.08,2366.14 -2728.35,2224.41 -2728.35,2137.8 -2700.79,2110.24 -2700.79,2088.19 CON5.7 -2677.95,1705.51 -2228.35,1255.91 -2228.35,842.52 -2184.25,798.43 -2184.25,507.87 -2196.06,496.06 -2700.79,496.06 -2755.91,440.94 v1(-2767.72,440.94)
P1.0: LED7.1 U1.19 | length 789.3
  Top w11.81: LED7.1 -3204.72,1425.2 -3125.98,1503.94 -3125.98,1647.24 -3080.31,1692.91 -2929.13,1692.91 -2919.69,1702.36 U1.19
P1.1: LED6.1 U1.20 | length 730
  Top w11.81: LED6.1 -3220.47,1484.25 -3153.54,1551.18 -3153.54,1736.22 -3129.92,1759.84 -2969.69,1759.84 U1.20
P1.2: K7.2 R29.2 U1.1 | length 2465.4
  Top w11.81: U1.1 -2968.5,1165.35 -2944.88,1141.73 v1@-2889.76,1141.73 ; v1(-2889.76,1137.8) v1@-2889.76,1141.73 ; R29.2 v1@-2889.76,1141.73 ; v1(-2708.66,1098.43) -2696.85,1086.61 -2515.75,1086.61 -2496.06,1066.93 -2496.06,877.95 -2464.57,846.46 -1799.21,846.46 -1771.65,874.02 -1771.65,1122.05 -1755.91,1137.8 -1459.45,1137.8 -1404.33,1192.91 K7.2
  Bottom w11.81: v1(-2889.76,1137.8) -2748.03,1137.8 v1(-2708.66,1098.43)
P1.3: K8.2 R30.2 U1.2 | length 3060.9
  Top w11.81: v1(-2921.26,1228.35) -2921.26,1227.17 v1@-2918.5,1224.41 ; U1.2 v1@-2918.5,1224.41 ; R30.2 -2902.76,1204.72 -2918.5,1220.47 v1@-2918.5,1224.41 ; v1(-2696.85,1177.17) -2696.85,1157.48 -2685.04,1145.67 -2681.1,1145.67 -2649.61,1114.17 -2503.94,1114.17 -2468.5,1078.74 -2468.5,893.7 -2448.82,874.02 -1818.9,874.02 -1803.15,889.76 -1803.15,1149.61 -1783.46,1169.29 -1562.99,1169.29 -1531.5,1200.79 -1531.5,1318.9 -1503.94,1346.46 -1338.58,1346.46 -1326.77,1334.65 -1326.77,901.57 -1345.28,883.07 K8.2
  Bottom w11.81: v1(-2921.26,1228.35) -2874.02,1228.35 -2830.71,1177.17 v1(-2696.85,1177.17)
P1.4: CON7.2 K9.2 R31.2 U1.3 | length 3777
  Top w11.81: R31.2 -2848.82,1267.72 -2868.5,1287.4 U1.3 -2868.5,1476.38 -2766.14,1578.74 -2476.38,1578.74 -2433.07,1622.05 v1(-2433.07,2019.69) ; CON7.2 -2559.06,2959.84 -2581.89,2937.01 -2581.89,2637.8 -2570.08,2625.98 -2255.91,2625.98 -2208.66,2578.74 -2208.66,2059.06 v1(-2165.35,2019.69) -2165.35,1984.25 -2145.67,1964.57 -1521.26,1964.57 -1481.89,1925.2 -1481.89,1771.65 K9.2
  Bottom w11.81: v1(-2433.07,2019.69) v1(-2165.35,2019.69)
P1.5: CON7.3 U1.4 | length 2433.3
  Top w11.81: U1.4 -2818.5,1464.57 -2731.89,1551.18 -2413.39,1551.18 -2381.89,1582.68 -2381.89,2279.53 -2322.83,2338.58 -2322.83,2507.87 -2338.58,2523.62 -2633.86,2523.62 -2685.04,2574.8 -2685.04,2826.77 v1(-2716.54,2858.27)
  Bottom w11.81: v1(-2716.54,2858.27) -2497.64,2858.27 CON7.3
P1.6: R37.1 U1.5 U8.2 | length 1530.4
  Top w11.81: U1.5 -2768.5,1463.78 -2708.66,1523.62 -2362.2,1523.62 v1(-2330.71,1578.74) ; R37.1 -2007.87,1019.69 -2027.56,1039.37 -2027.56,1216.54 -1990.55,1253.54 U8.2
  Bottom w11.81: v1(-2330.71,1578.74) -2122.05,1370.08 -2122.05,1295.28 -2080.31,1253.54 U8.2
P3.5: CON7.6 U1.16 | length 1777
  Top w11.81: v1(-2960.63,1909.45) -2948.82,1921.26 -2809.06,1921.26 -2769.69,1881.89 U1.16
  Bottom w11.81: v1(-2960.63,1909.45) -2960.63,2291.34 -2925.2,2326.77 -2925.2,2744.09 -2877.95,2791.34 -2551.18,2791.34 -2535.43,2807.09 -2440.94,2807.09 -2397.64,2850.39 -2397.64,2858.27 CON7.6
P3.6: CON7.7 U1.17 | length 2001.6
  Top w11.81: v1(-3047.24,1913.39) -3047.24,1874.02 -3023.62,1850.39 -2835.43,1850.39 -2819.69,1834.65 U1.17
  Bottom w11.81: v1(-3047.24,1913.39) -3047.24,1984.25 -3027.56,2003.94 -3027.56,2850.39 -2956.69,2921.26 -2570.87,2921.26 -2559.06,2909.45 -2456.69,2909.45 -2409.45,2956.69 -2399.21,2956.69 CON7.7
P3.7: LED8.1 U1.18 | length 873.7
  Top w11.81: LED8.1 -3224.41,1543.31 -3181.1,1586.61 -3181.1,1767.72 -3137.8,1811.02 -2877.95,1811.02 -2866.14,1799.21 -2866.14,1751.57 U1.18
P5.4: CON7.8 U1.7 | length 2682.3
  Top w11.81: U1.7 -2668.5,1425.98 -2633.86,1460.63 -2287.4,1460.63 -2259.84,1488.19 -2259.84,2539.37 -2279.53,2559.06 -2610.24,2559.06 -2645.67,2594.49 -2645.67,3000 -2539.37,3106.3 -2421.26,3106.3 -2389.76,3074.8 -2396.06,3068.5 CON7.8
P5.5: CON7.1 U1.9 | length 2410.8
  Top w11.81: U1.9 -2568.5,1411.81 -2551.18,1429.13 -2287.4,1429.13 -2236.22,1480.31 -2236.22,2566.93 -2259.84,2590.55 -2582.68,2590.55 -2610.24,2618.11 -2610.24,2992.13 -2590.55,3011.81 -2519.69,3011.81 -2496.06,3035.43 CON7.1
RST_N: C3.1 CON6.3 CON9.5 K6.2 R13.2 R14.2 R19.1 | length 3910.8
  Top w11.81: CON9.5 -2728.35,760.63 -2728.35,1015.75 -2744.09,1031.5 CON6.3 ; R13.2 C3.1 -2509.22,1174.1 -2496.06,1153.54 -2496.06,1157.48 ; R14.2 -2496.06,1157.48 ; R19.1 -1511.81,2106.3 -1480.31,2074.8 -1407.09,2074.8 K6.2 -1375.2,2072.05 -1330.71,2027.56 -1330.71,1401.57 -1358.27,1374.02 -1543.31,1374.02 -1566.93,1350.39 -1566.93,1244.09 -1598.43,1212.6 -1795.28,1212.6 -1834.65,1173.23 -1834.65,925.2 -1854.33,905.51 -2405.51,905.51 -2405.51,909.45 -2425.2,929.13 v1(-2421.26,1086.61) -2496.06,1157.48
  Bottom w11.81: CON6.3 -2777.95,1014.17 -2744.09,980.31 -2480.31,980.31 -2437.01,1023.62 v1(-2421.26,1086.61)
RXD: SW2.5 SW2.6 U2.1 U4.3 | length 1951.8
  Top w11.81: U2.1 -4582.68,1224.41 -4515.75,1291.34 -4515.75,1334.65 -4444.88,1405.51 -4228.35,1405.51 -4141.73,1492.13 -4141.73,1507.68 -4098.43,1550.98 U4.3 -3952.76,1550.98 -3937.01,1535.24 -3937.01,1137.8 -3666.54,1137.8 SW2.5 SW2.6
RXD_MCU: SW2.9 SW2.11 U1.12 | length 2332.9
  Top w11.81: v1(-3102.36,1000) -3102.36,1291.34 -3070.87,1322.83 -3070.87,1598.43 -3039.37,1629.92 -2590.55,1629.92 -2574.8,1645.67 -2574.8,1748.03 U1.12
  Bottom w11.81: SW2.11 -3833.07,754.33 -3803.15,784.25 -3653.54,784.25 -3633.07,763.78 ; SW2.9 -3633.07,763.78 ; v1(-3102.36,1000) -3102.36,933.07 -3141.73,893.7 -3394.49,893.7 -3429.13,928.35 -3590.55,928.35 -3633.07,885.83 -3633.07,763.78
RXD_MTK: R5.2 SW2.8 | length 134.3
  Top w11.81: R5.2 -3582.68,654.72 SW2.8
TXD: R18.2 SW2.3 SW2.4 U2.3 | length 1339.7
  Top w11.81: U2.3 -4157.48,1024.41 -4141.73,1040.16 -4141.73,1082.68 -4125.98,1098.43 -3996.06,1098.43 ; R18.2 -3996.06,1098.43 ; SW2.4 SW2.3 -3733.07,1078.74 -3752.76,1098.43 -3996.06,1098.43
TXD_MCU: SW2.7 SW2.12 U1.11 | length 2464.3
  Top w11.81: v1(-3283.46,795.28) -3283.46,799.21 -3133.86,799.21 -3043.31,889.76 -3043.31,1570.87 -3007.87,1606.3 -2535.43,1606.3 -2519.69,1622.05 U1.11
  Bottom w11.81: SW2.12 -3933.07,653.54 -3913.39,633.86 -3456.69,633.86 -3433.07,657.48 -3433.07,751.97 -3389.76,795.28 v1(-3283.46,795.28)
TXD_MTK: R1.2 SW2.10 | length 116.7
  Top w11.81: R1.2 -3740.16,697.24 SW2.10
UART_RX: CON6.6 CON9.7 R1.1 SW2.1 | length 1906
  Top w11.81: SW2.1 -3933.07,940.94 -3996.06,877.95 -3996.06,610.24 -3964.57,578.74 R1.1@-3803.15,578.74 ; R1.1 R1.1@-3803.15,578.74 ; CON6.6 -2974.8,734.65 CON9.7 -3007.87,685.04 -3007.87,622.05 -3047.24,582.68 -3220.47,582.68 -3259.84,543.31 -3803.15,543.31 R1.1@-3803.15,578.74
UART_TX: CON6.2 CON9.4 R5.1 SW2.2 | length 2140.8
  Top w11.81: SW2.2 -3833.07,864.57 -3811.02,842.52 -3397.64,842.52 -3374.02,818.9 -3374.02,633.86 -3417.32,590.55 ; R5.1 -3417.32,590.55 ; v1(-3066.93,625.98) -3244.09,625.98 -3279.53,590.55 -3417.32,590.55 ; CON6.2 -2629.92,983.46 -2629.92,799.21 -2674.8,754.33 CON9.4
  Bottom w11.81: v1(-3066.93,625.98) -2720.47,625.98 -2674.8,671.65 CON9.4
VCC_IN: CON3.1 DC5V_DL.5 R15.1 SW7.3 U6.3 U7.2 Z3.2 | length 7513.4
  Top w11.81: U7.2 -4570.87,2362.2 -4559.06,2350.39 v1(-4559.06,2311.02) ; Z3.2 -2058.07,2833.07 -2043.31,2818.31 DC5V_DL.5
  Top w39.37: SW7.3 -4606.3,2681.1 -4574.8,2649.61 -4574.8,2397.64 ; R15.1 -4574.8,2397.64 ; U7.2 -4574.8,2363.27 -4574.8,2397.64 ; v1(-4559.06,2192.91) -4418.76,2192.91 U6.3 ; v1(-1645.67,2488.19) -1295.28,2488.19 -1275.59,2468.5 -1275.59,696.85 -1307.09,665.35 -1409.45,665.35 -1440.94,633.86 CON3.1
  Bottom w11.81: DC5V_DL.5 DC5V_DL.5@-2039.37,2754.77
  Bottom w39.37: SW7.3 -4779.53,2692.91 -3497.09,2692.91 -3032.52,3157.48 -2259.84,3157.48 -2192.91,3090.55 -2192.91,2790.2 -2157.48,2754.77 DC5V_DL.5 ; v1(-4559.06,2192.91) v1(-4559.06,2311.02) ; DC5V_DL.5@-2039.37,2754.77 -1846.46,2754.77 -1827.91,2736.22 -1827.91,2562.99 -1807.09,2542.17 -1673.23,2542.17 -1645.67,2514.61 v1(-1645.67,2488.19)
WIFI_ANT: CON5.5 CON8.8 | length 469.9
  Top w11.81: CON8.8 -3074.8,2122.05 -3018.11,2065.35 CON5.5
XI: C2.2 CY1.1 U4.8 | length 240.7
  Top w11.81: U4.8 -3872.24,1800.98 C2.2 -3862.2,1795.28 CY1.1
XO: C1.1 CY1.3 U4.7 | length 471.3
  Top w11.81: U4.7 -4031.37,1751.97 v2(-3948.82,1724.41) ; C1.1 -3803.15,1637.8 -3814.96,1649.61 CY1.3 -3814.47,1665.35 -3775.59,1665.35 -3755.91,1685.04 v2(-3755.91,1724.41)
  Bottom w11.81: v2(-3948.82,1724.41) v2(-3755.91,1724.41)
pads on no net: CON5.1 CON6.7 CON6.8 CON8.1 CON9.1 CON9.2 CON10.2 CON10.10 CON10.11 DC5V_DL.3 DC5V_DL.4 K1.3 K1.4 K2.3 K2.4 K3.3 K3.4 K4.3 K4.4 K5.3 K5.4 K6.3 K6.4 K7.3 K7.4 K8.3 K8.4 K9.3 K9.4 K10.3 K10.4 SW7.1 SW7.4 SW7.5 U3.4 U4.9 U4.10 U4.11 U4.12 U4.13 U4.14 U4.15 U6.4

## Keep-outs
Keep-Out Layer:
  lines w10: -5018.7,-140.75 -5018.7,3139.63 ; -5018.69,-140.38 ccw(c-4694.27,-146.04) -4689.17,-470.48 ; -5018.71,3139.89 cw(c-4624.17,3152.98) -4604.2,3547.23 ; -4688.98,-470.47 -1427.17,-470.47 ; -4604.57,3547.24 -1527.56,3547.24 ; -1527.89,3547.21 cw(c-1482.59,3143.39) -1078.7,3098.8 ; -1427.32,-470.48 ccw(c-1443.9,-105.31) -1078.73,-121.9 ; -1078.74,-122.05 -1078.74,3098.43

## Silkscreen, mask and mechanical layers (free items; w line width, h text height)
Silkscreen Top:
  circle w78.74: c-2326.77,2232.28 r36.3
  lines w10: -3921.26,2220.47 -3889.76,2129.92 ; -3889.76,2133.86 -3850.39,2133.86 -3826.77,2220.47 ; -3732.28,669.29 -3732.28,637.8 -3629.92,637.8 -3629.92,669.29 ; -3531.5,669.29 -3531.5,633.86 -3433.07,633.86 -3433.07,669.29
  text "RF OUT 50R" at -4496.06,3078.74 h30.32
  text "AC 110V~220V" at -1618.11,3023.62 h30.32
  text "OFF" at -4814.96,2885.83 h30.32 r90
  text "NRF24L01+" at -2594.49,2771.65 h30.32 r90
  text "GPIO12" at -3917.32,2625.98 h29.53 r90
  text "DL_MCU" at -3818.9,2625.98 h29.53 r90
  text "CH_PD_H" at -3716.54,2614.17 h29.53 r90
  text "GPIO15_H" at -3507.87,2614.17 h29.53 r90
  text "GPIO2_H" at -3413.39,2614.17 h29.53 r90
  text "GPIO0_H" at -3614.17,2610.24 h29.53 r90
  text "NC" at -2374.02,2519.69 h29.53 r90
  text "GPIO2" at -2456.69,2460.63 h29.53 r90
  text "ANT" at -3066.93,2456.69 h29.53 r90
  text "GPIO15" at -2862.2,2456.69 h29.53 r90
  text "GPIO0" at -2771.65,2456.69 h29.53 r90
  text "GPIO14" at -2657.48,2456.69 h29.53 r90
  text "GPIO13" at -2559.06,2456.69 h29.53 r90
  text "GPIO12" at -2964.57,2452.76 h29.53 r90
  text "ON" at -4807.09,2405.51 h30.32 r90
  text "DL" at -3893.7,2051.18 h50
  text "ESP_RST" at -1287.4,2051.18 h30.32 r90
  text "MCU_P1.4" at -1275.59,1669.29 h30.32 r90
  text "CDS" at -2043.31,1606.3 h30.32 r90
  text "USB_UART" at -4440.94,1456.69 h30.32 r90
  text "MCU_P1.2" at -1279.53,1255.91 h30.32 r90
  text "RXD" at -4677.17,1204.72 h30.32
  text "DS18B20" at -2043.31,1157.48 h30.32 r90
  text "GND" at -4688.98,1102.36 h30.32
  text "DC_R_ON" at -3917.32,1078.74 h30.32 r90
  text "DC_T_ON" at -3814.96,1078.74 h30.32 r90
  text "ESP_T_ON" at -3712.6,1078.74 h30.32 r90
  text "MCU_T_ON" at -3610.24,1078.74 h30.32 r90
  text "ESP_R_ON" at -3507.87,1078.74 h30.32 r90
  text "MCU_R_ON" at -3413.39,1078.74 h30.32 r90
  text "TXD" at -4685.04,1000 h30.32
  text "MCU_P1.3" at -1279.53,866.14 h30.32 r90
  text "DC-" at -4677.17,791.34 h30.32
  text "DC+" at -4681.1,661.42 h30.32
  text "NC" at -2350.39,598.43 h30.32 r90
  text "TX" at -2661.42,594.49 h30.32 r90
  text "NC" at -2452.76,594.49 h30.32 r90
  text "RX" at -2968.5,586.61 h30.32 r90
  text "GND" at -2555.12,562.99 h30.32 r90
  text "TXD" at -3649.61,543.31 h30.32 r90
  text "3.3V" at -2858.27,543.31 h30.32 r90
  text "RXD" at -3433.07,539.37 h30.32 r90
  text "CH_PD" at -3098.43,507.87 h29.53 r90
  text "RST_N" at -2771.65,496.06 h30.32 r90
  text "BEEP" at -1440.94,374.02 h30.32 r90
  text "DC5V_IN" at -4362.2,303.15 h30.32 r90
  text "GPIO0" at -1838.58,216.54 h30.32
  text "GPIO14" at -4125.98,212.6 h30.32
  text "GPIO12" at -3653.54,212.6 h30.32
  text "GPIO13" at -3212.6,204.72 h30.32
  text "GPIO15" at -2771.65,204.72 h30.32
  text "GPIO2" at -2307.09,204.72 h30.32
Solder Mask Top:
  drawing of 396 lines, arcs and shapes, not listed
  text "ESP8266全功能测试板" at -3877.95,3196.85 h157.48
  text "深圳市安信可科技有限公司" at -3763.78,-236.22 h118.11